# Altium PCB 105358-3LA002-01_EFM1-Hybrid.PcbDoc
Units mm, origin at the board's own origin, x right, y up, seen from the top; angles counter-clockwise.
Board outline 105.1 x 52.21 mm, 6 copper layers (Component Side, Inner Layer 1, Ground Plane (GND), Power Plane (VCC), Inner Layer 2, Solder Side), stack 0.975 mm thick; 1 components, 0 nets, 21 pads, 0 vias.
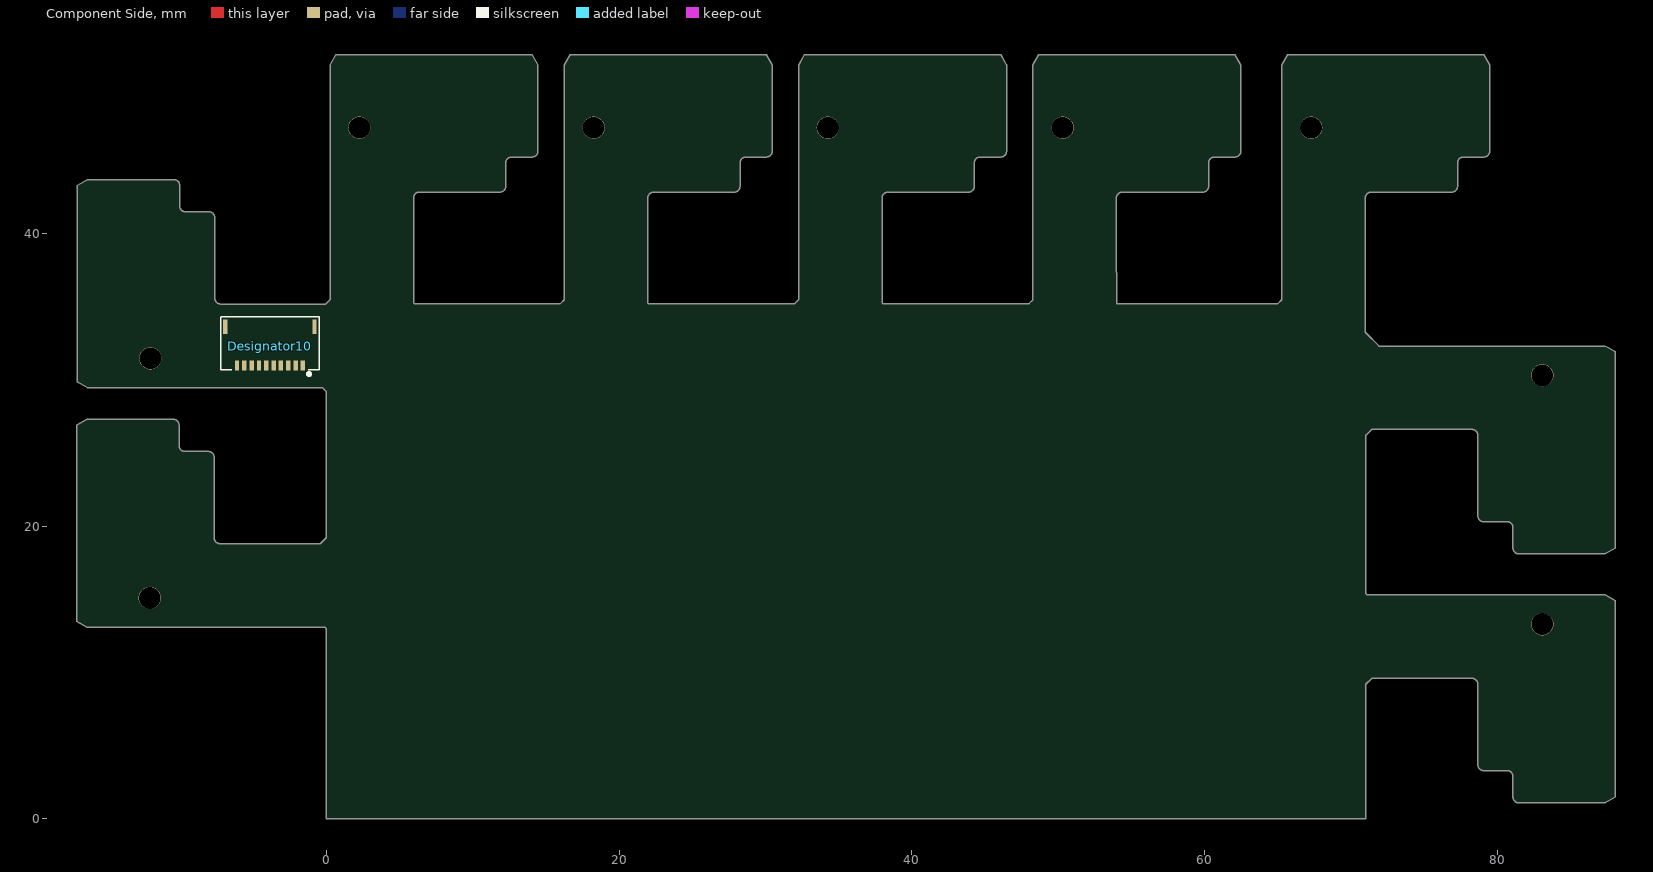
[diagram p0: Component Side view]
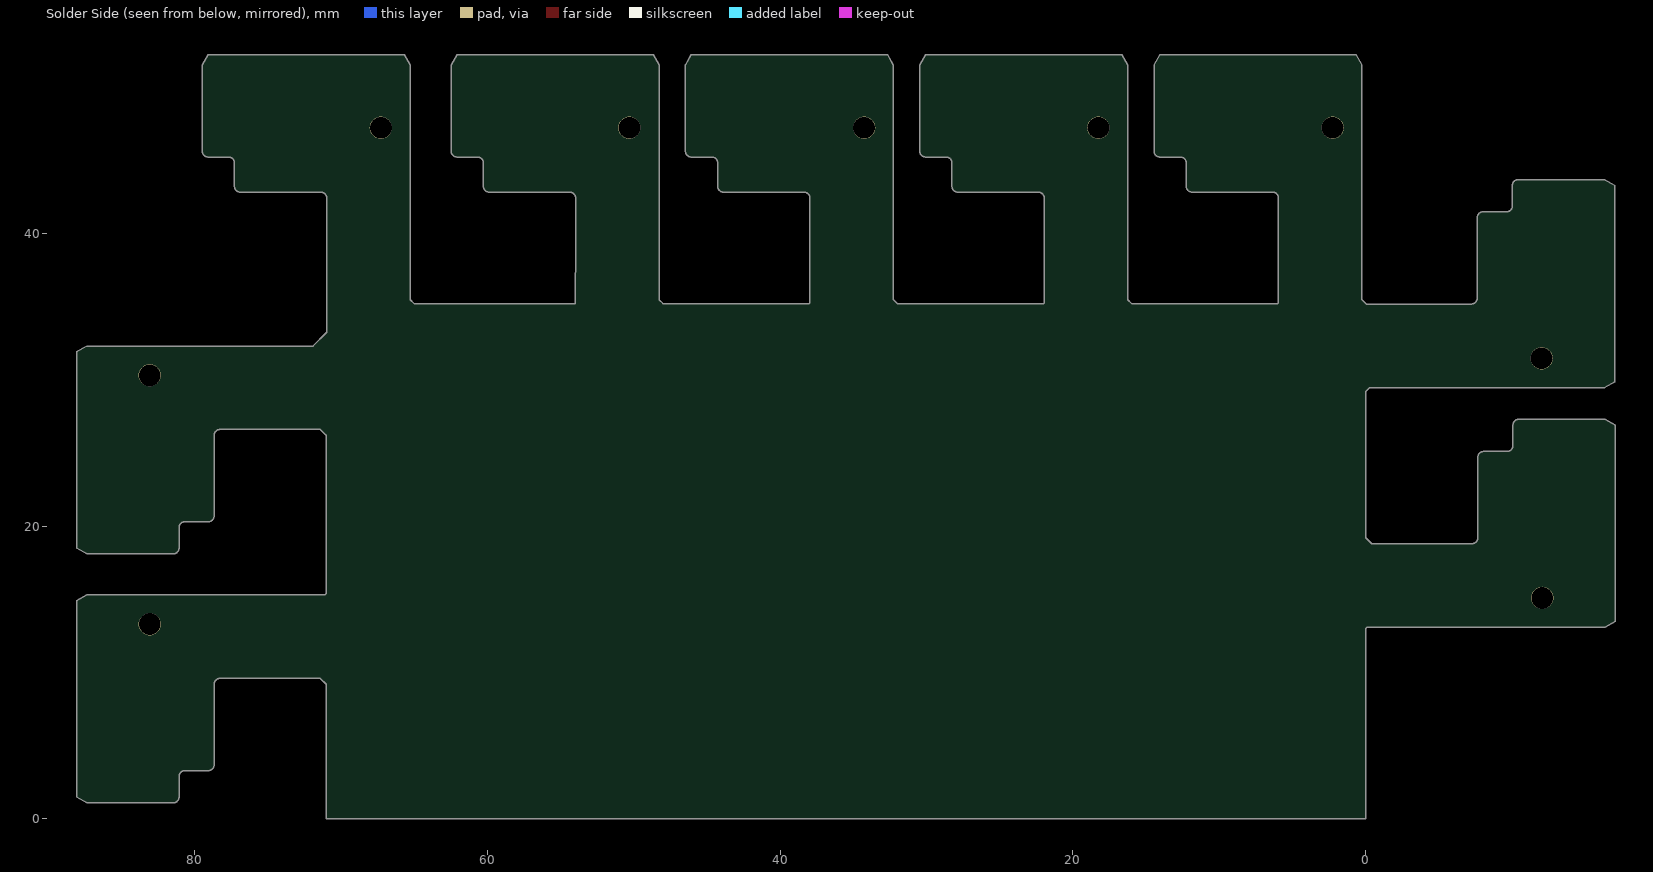
[diagram p1: Solder Side view, seen from below]
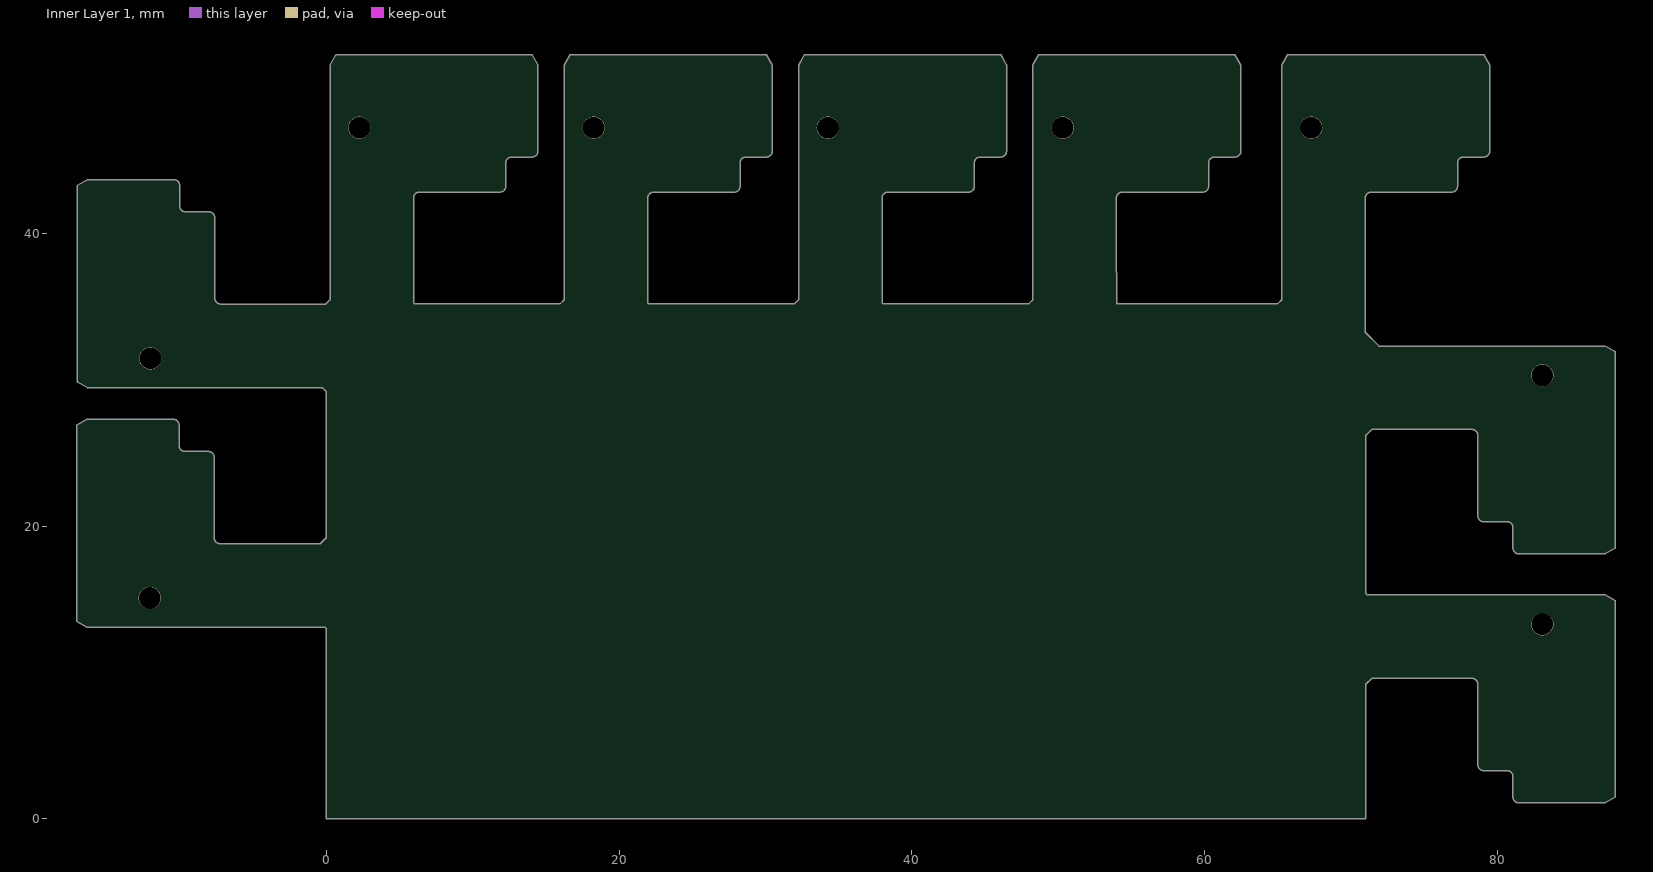
[diagram p2: Inner Layer 1]
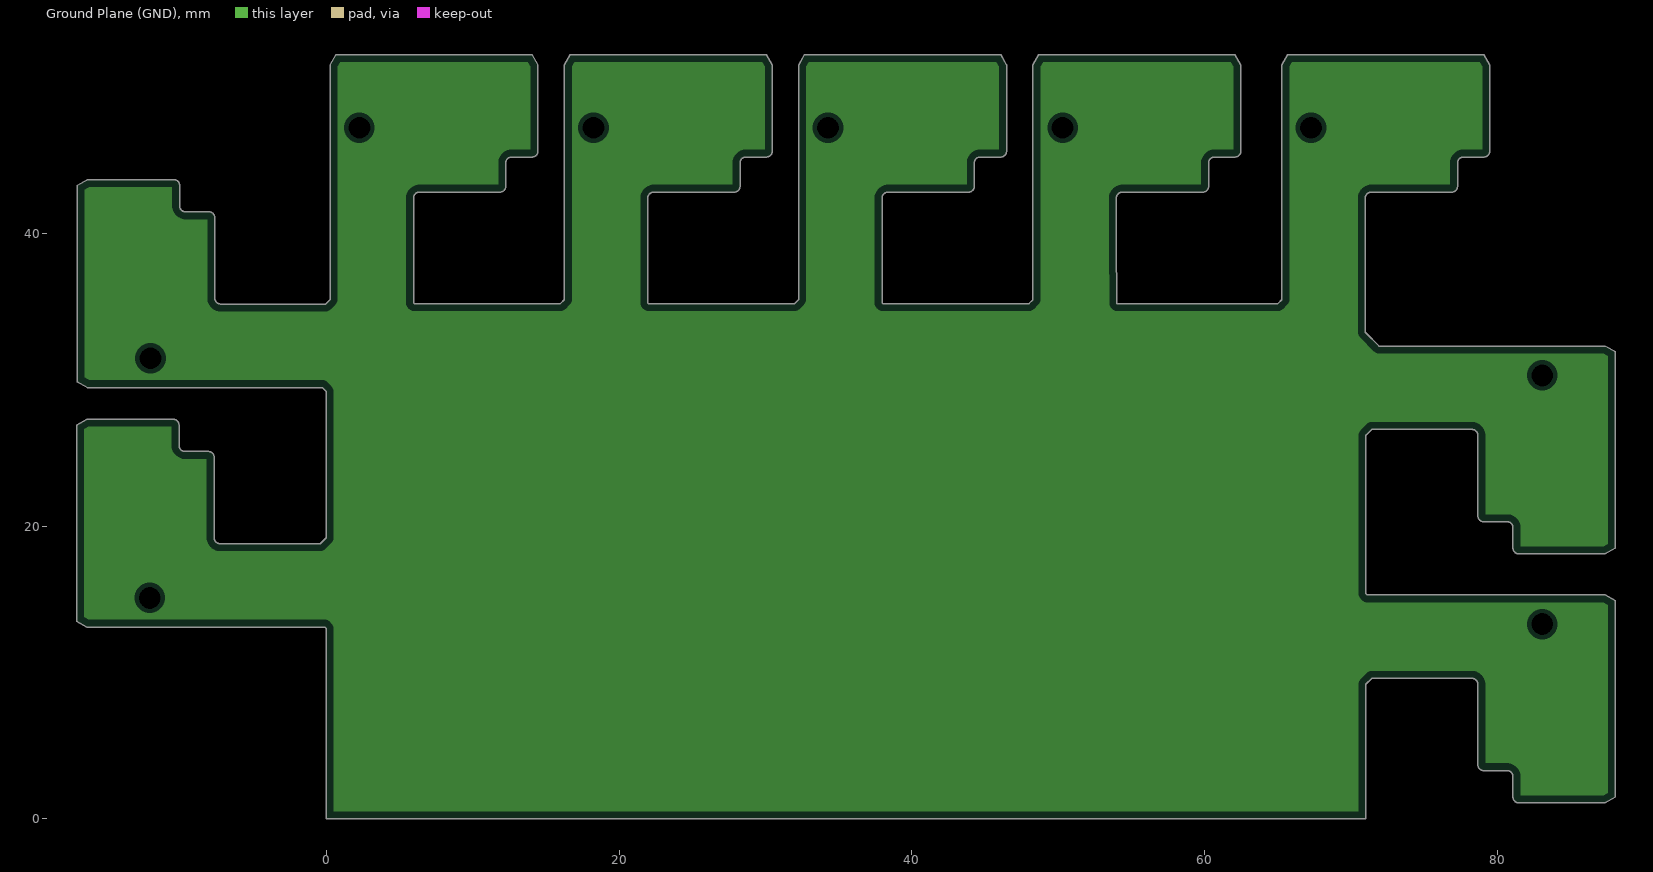
[diagram p3: Ground Plane (GND), clearances drawn from the general rule]
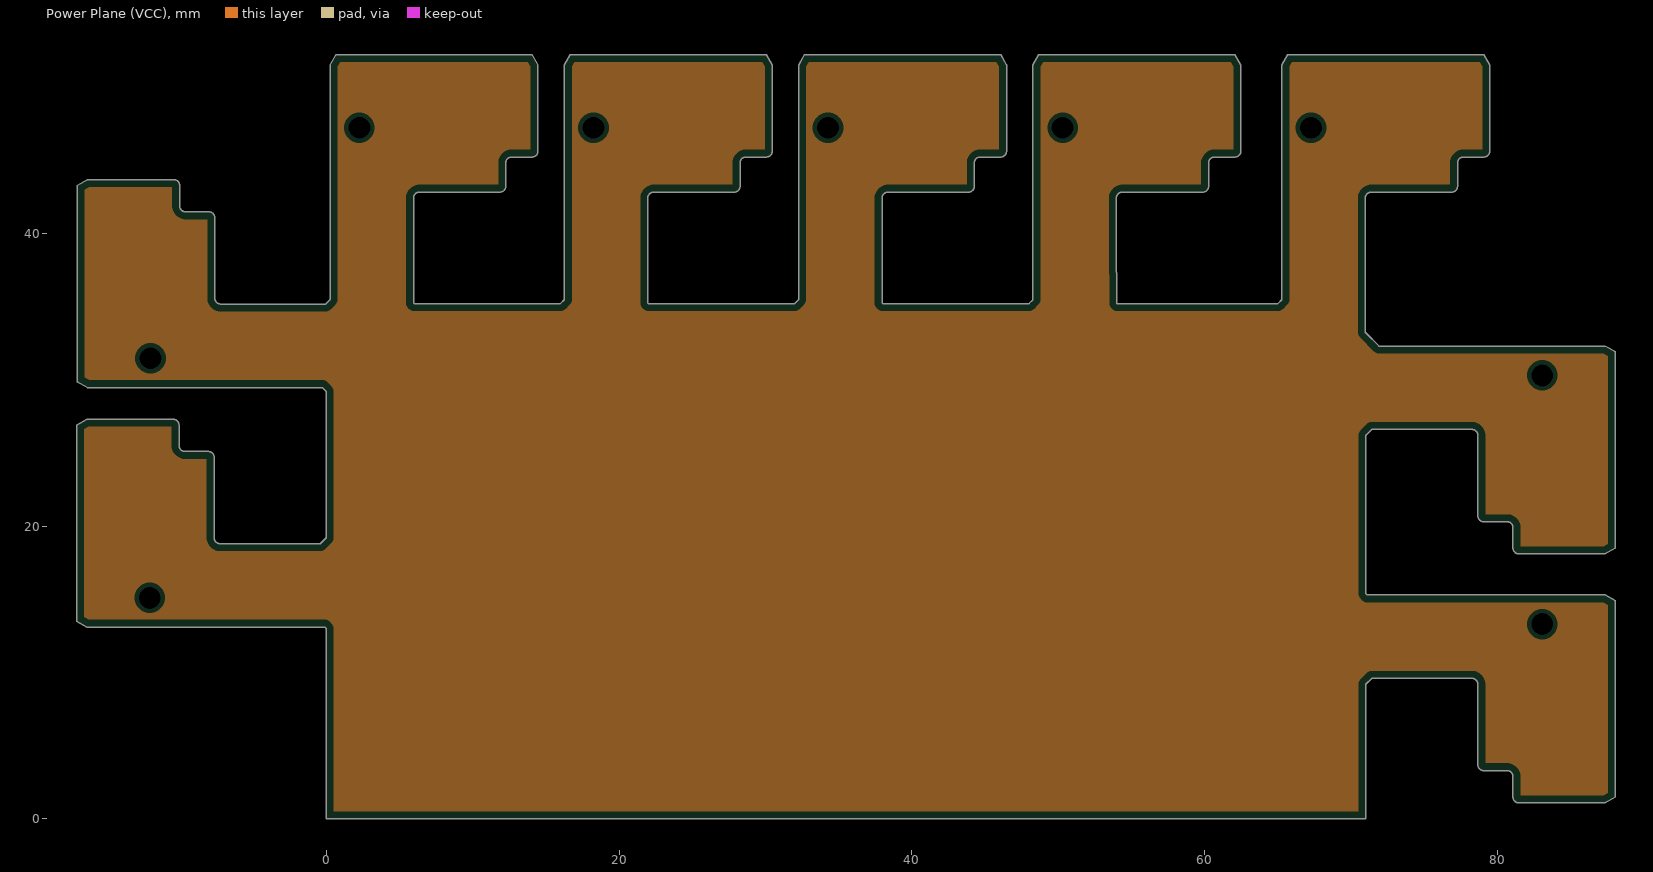
[diagram p4: Power Plane (VCC), clearances drawn from the general rule]
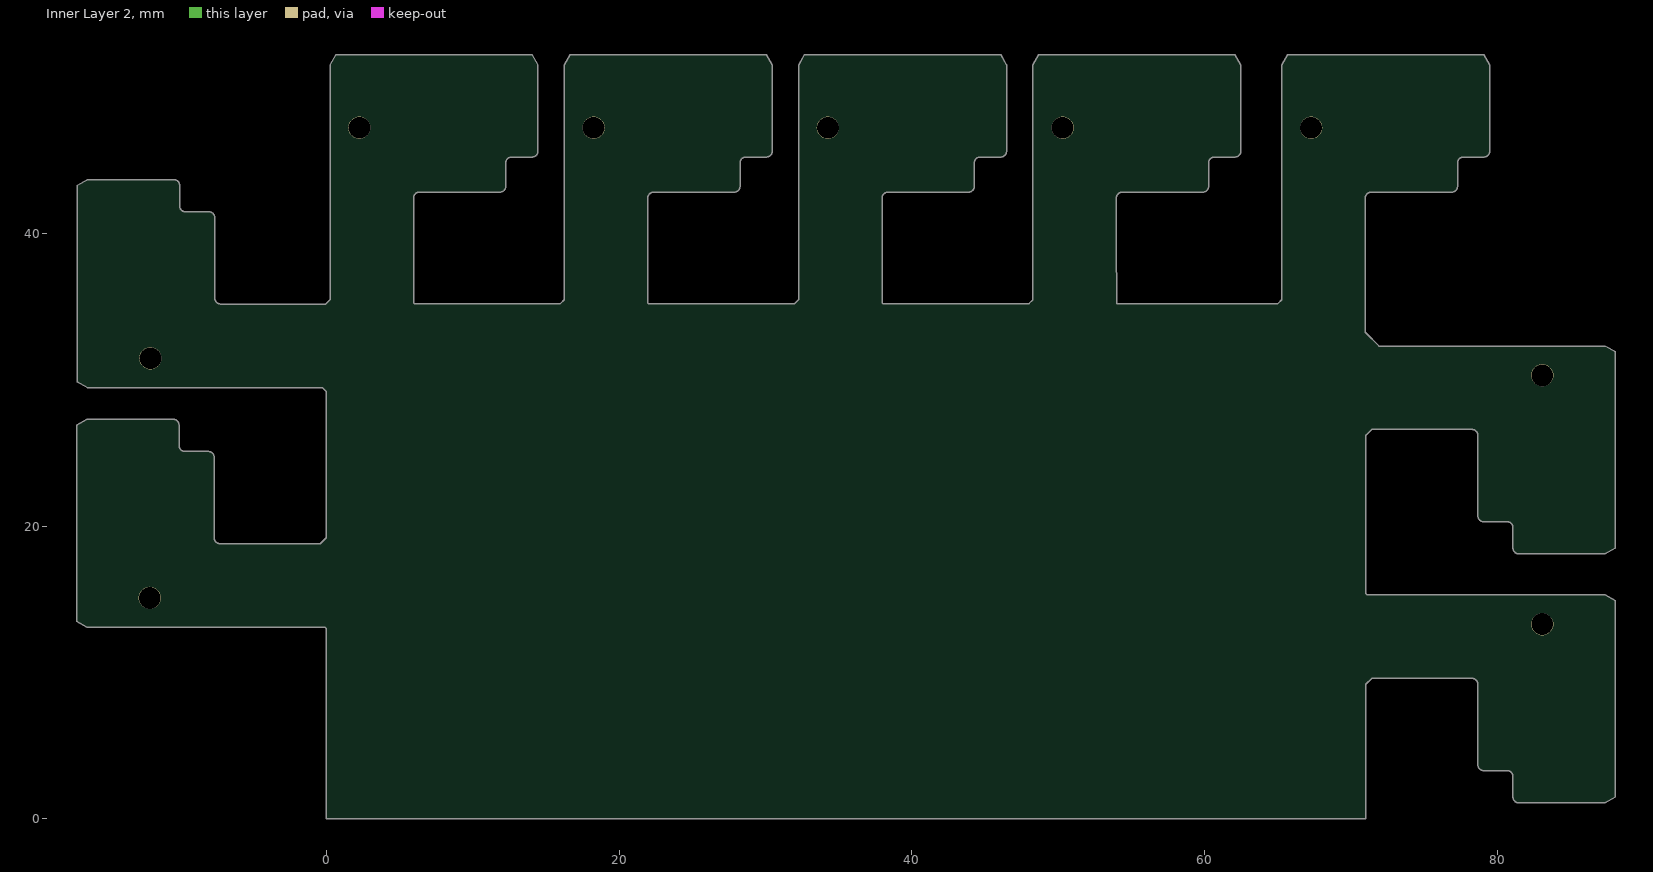
[diagram p5: Inner Layer 2]

## Layer stack, top to bottom
Top Solder: solder mask 0.0178, Solder Resist, Dk 4
Component Side: signal copper 0.0356
Dielectric 1: prepreg 0.0635, FR-4, Dk 4.2
Inner Layer 1: signal copper 0.0356
Dielectric 3: prepreg 0.0635, FR-4, Dk 4.2
Ground Plane (GND): plane copper 0.0356
Dielectric 6: core 0.508, FR-4, Dk 4.2
Power Plane (VCC): plane copper 0.0356
Dielectric 5: prepreg 0.0635, FR-4, Dk 4.2
Inner Layer 2: signal copper 0.0356
Dielectric 4: prepreg 0.0635, FR-4, Dk 4.2
Solder Side: signal copper 0.0356
Bottom Solder: solder mask 0.0178, Solder Resist, Dk 4

## Board outline
-16.35,13.1 -17.05,13.504 -17.05,26.896 -16.35,27.3 -10.45,27.3 cw(c-10.45,26.9) -10.05,26.9 -10.05,25.5 ccw(c-9.65,25.5) -9.65,25.1 -8.05,25.1 cw(c-8.05,24.7) -7.65,24.7 -7.65,19.2 ccw(c-7.25,19.2) -7.25,18.8 -0.4,18.8 0,19.2 0,29.2 -0.264,29.464 -16.306,29.464 -17.006,29.868 -17.006,43.26 -16.306,43.664 -10.406,43.664 cw(c-10.406,43.264) -10.006,43.264 -10.006,41.864 ccw(c-9.606,41.864) -9.606,41.464 -8.006,41.464 cw(c-8.006,41.064) -7.606,41.064 -7.606,35.564 ccw(c-7.206,35.564) -7.206,35.164 -0.036,35.164 0.264,35.464 0.264,51.506 0.668,52.206 14.06,52.206 14.464,51.506 14.464,45.606 cw(c14.064,45.606) 14.064,45.206 12.664,45.206 ccw(c12.664,44.806) 12.264,44.806 12.264,43.206 cw(c11.864,43.206) 11.864,42.806 6.364,42.806 ccw(c6.364,42.406) 5.964,42.406 5.964,35.236 6,35.2 16,35.2 16.264,35.464 16.264,51.506 16.668,52.206 30.06,52.206 30.464,51.506 30.464,45.606 cw(c30.064,45.606) 30.064,45.206 28.664,45.206 ccw(c28.664,44.806) 28.264,44.806 28.264,43.206 cw(c27.864,43.206) 27.864,42.806 22.364,42.806 ccw(c22.364,42.406) 21.964,42.406 21.964,35.236 22,35.2 32,35.2 32.264,35.464 32.264,51.506 32.668,52.206 46.06,52.206 46.464,51.506 46.464,45.606 cw(c46.064,45.606) 46.064,45.206 44.664,45.206 ccw(c44.664,44.806) 44.264,44.806 44.264,43.206 cw(c43.864,43.206) 43.864,42.806 38.364,42.806 ccw(c38.364,42.406) 37.964,42.406 37.964,35.236 38,35.2 48,35.2 48.264,35.464 48.264,51.506 48.668,52.206 62.06,52.206 62.464,51.506 62.464,45.606 cw(c62.064,45.606) 62.064,45.206 60.664,45.206 ccw(c60.664,44.806) 60.264,44.806 60.264,43.206 cw(c59.864,43.206) 59.864,42.806 54.364,42.806 ccw(c54.364,42.406) 53.964,42.406 53.964,37.326 54,37.29 54,35.2 65,35.2 65.264,35.464 65.264,51.506 65.668,52.206 79.06,52.206 79.464,51.506 79.464,45.606 cw(c79.064,45.606) 79.064,45.206 77.664,45.206 ccw(c77.664,44.806) 77.264,44.806 77.264,43.206 cw(c76.864,43.206) 76.864,42.806 71.364,42.806 ccw(c71.364,42.406) 70.964,42.406 70.964,33.236 71.02,33.18 71,33.2 71.9,32.3 87.35,32.3 88.05,31.896 88.05,18.504 87.35,18.1 81.45,18.1 cw(c81.45,18.5) 81.05,18.5 81.05,19.9 ccw(c80.65,19.9) 80.65,20.3 79.05,20.3 cw(c79.05,20.7) 78.65,20.7 78.65,26.2 ccw(c78.25,26.2) 78.25,26.6 71.4,26.6 71.3,26.5 71.1,26.3 71,26.2 71,15.4 71.1,15.3 87.35,15.3 88.05,14.896 88.05,1.504 87.35,1.1 81.45,1.1 cw(c81.45,1.5) 81.05,1.5 81.05,2.9 ccw(c80.65,2.9) 80.65,3.3 79.05,3.3 cw(c79.05,3.7) 78.65,3.7 78.65,9.2 ccw(c78.25,9.2) 78.25,9.6 71.4,9.6 71,9.2 71,0 0,0 0,13 -0.1,13.1

## Design rules (kind name [scope] priority, off if disabled: settings)
AcuteAngle [All] p1: minimum=6.00000000000000E+0001 checktracksonly=FALSE
AssemblyTestpoint [(IsPad And (OnTopLayer Or OnBottomLayer)) Or (IsVia) Or (IsPad And OnMultiLayer)] p1: testpointundercomponent=TRUE minsize=0.8 maxsize=2.5 preferedsize=1 minholesize=0 maxholesize=2 preferedholesize=0.7 testpointgrid=0.025 usegrid=FALSE gridtolerance=0 allowsidebottom=TRUE minspacing=2.54
BoardOutlineClearance [All] p1: gap=0.15 ignorepadtopadclearanceinfootprint=FALSE
Clearance Clearance_FIDU [InComponentClass('FIDU')] p1: gap=0.2 ignorepadtopadclearanceinfootprint=FALSE except(0: Arc-Hole Track-Hole SMDPad-Hole THPad-Hole Via-Hole Fill-Hole Poly-Hole Region-Hole Text-Hole)
Clearance TRX_LINE_CLEARENCE [InNetClass('RF_50_Ohm')] p2: gap=0.4 ignorepadtopadclearanceinfootprint=FALSE except(0: Arc-Hole Track-Hole SMDPad-Hole THPad-Hole Via-Hole Fill-Hole Poly-Hole Region-Hole Text-Hole)
Clearance Clearance_4 [All] p3: gap=0.127 ignorepadtopadclearanceinfootprint=FALSE // All - All
Clearance Clearance_2 [InNetClass('Primary') vs InNetClass('Primary') or InNet('GND')] p4: gap=2.5 ignorepadtopadclearanceinfootprint=FALSE except(0: Arc-Hole Track-Hole SMDPad-Hole THPad-Hole Via-Hole Fill-Hole Poly-Hole Region-Hole Text-Hole) // Primary - Primary
Clearance Clearance_1 [OnLayer('Mid-Layer 1') or OnLayer('Multi-Layer') vs OnLayer('Mid-Layer 1')] p5: gap=0.4 ignorepadtopadclearanceinfootprint=FALSE except(0: Arc-Hole Track-Hole SMDPad-Hole THPad-Hole Via-Hole Fill-Hole Poly-Hole Region-Hole Text-Hole) // Inner Layers
Clearance Clearance_TP [InComponentClass('TP')] p6: gap=0.127 ignorepadtopadclearanceinfootprint=FALSE except(0: Arc-Hole Track-Hole SMDPad-Hole THPad-Hole Via-Hole Fill-Hole Poly-Hole Region-Hole Text-Hole; 0.2: Arc-Arc Arc-Track Arc-SMDPad Arc-THPad Arc-Via Arc-Fill Arc-Poly Arc-Region Track-Track Track-SMDPad Track-THPad Track-Via Track-Fill Track-Poly Track-Region THPad-THPad THPad-Via THPad-Fill THPad-Poly THPad-Region)
ComponentClearance [ALL and not( ( InComponentClass('NET_TIE') or InComponentClass('TP'))OR InComponentClass('FIDU')or InComponentClass('3D_IGNORE')or InComponent('D401'))] p1: gap=0.15 collisioncheckmode=3 verticalgap=0.1 showdistances=TRUE
DiffPairsRouting [All] p1: maxlimit=0.254 minlimit=0.2 mostfreqgap=0.2 toplayer_minwidth=0.127 toplayer_maxwidth=0.381 toplayer_prefwidth=0.2 midlayer1_minwidth=0.127 midlayer1_maxwidth=0.381 midlayer1_prefwidth=0.2 midlayer2_minwidth=0.127 midlayer2_maxwidth=0.381 midlayer2_prefwidth=0.2 bottomlayer_minwidth=0.127 bottomlayer_maxwidth=0.381 bottomlayer_prefwidth=0.2 maxuncoupledlength=12.7
FabricationTestPointUsage TestPointUsage [All] p1: valid=0 allowmultiple=FALSE
FabricationTestpoint Testpoint [(IsPad And (OnTopLayer Or OnBottomLayer)) Or (IsVia) Or (IsPad And OnMultiLayer)] p1: side=2 testpointundercomponent=TRUE minsize=0.8 maxsize=2.5 preferedsize=1 minholesize=0 maxholesize=2 preferedholesize=0.7 testpointgrid=2.54 allowsidebottom=TRUE usegrid=TRUE gridoriginx=109.725 gridoriginy=79.23 gridtolerance=0 minspacing=2.54
FanoutControl Fanout_Default [All] p1: bgadir=Out bgaviamode=Centered fanoutstyle=Auto fanoutdirection=Alternating viagrid=0.025 // Fanout_Default (Default Rule)
FanoutControl Fanout_Small [(CompPinCount < 5)] p2: bgadir=Out bgaviamode=Centered fanoutstyle=Auto fanoutdirection=OutThenIn viagrid=0.025 // Fanout_Small (Default Rule)
FanoutControl Fanout_LCC [IsLCC] p4: bgadir=Out bgaviamode=Centered fanoutstyle=Auto fanoutdirection=Alternating viagrid=0.025 // Fanout_LCC (Default Rule)
FanoutControl Fanout_BGA [IsBGA] p5: bgadir=Out bgaviamode=Centered fanoutstyle=Auto fanoutdirection=Alternating viagrid=0.025 // Fanout_BGA (Default Rule)
HoleSize [All] p1: absolutevalues=TRUE maxlimit=3.5 minlimit=0.1 maxpercent=80.000 minpercent=20.000
HoleToHoleClearance [All] p1: gap=0.127 allowstackedmicrovias=TRUE
MinimumAnnularRing MinimumAnnularRing_Uvia1 [InDrillLayerPair('Component Side - Inner Layer 1')] p1: minimumring=0.074
MinimumAnnularRing MinimumAnnularRing_Uvia2 [InDrillLayerPair('Inner Layer 2 - Solder Side')] p2: minimumring=0.074
MinimumAnnularRing MinimumAnnularRing_2 [isPad] p3: minimumring=0.2
MinimumAnnularRing MinimumAnnularRing_1 [isVia] p4: minimumring=0.125
MinimumSolderMaskSliver [All] p1: minsoldermaskwidth=0.06
MinimumSolderMaskSliver SilkscreenOverComponentPads [IsPad] p2: minsoldermaskwidth=0.075
PlaneClearance [All] p1: clearance=0.3
PlaneConnect PlaneConnect_VIA [isVia or HasFootprint('PAD PROGRAMMING')] p1: planeconnectstyle=Direct reliefexpansion=0.508 reliefentries=4 reliefconductorwidth=0.254 reliefairgap=0.254
PlaneConnect [All] p2: planeconnectstyle=Relief reliefexpansion=0.508 reliefentries=4 reliefconductorwidth=0.254 reliefairgap=0.254
PolygonConnect PolygonConnect_NO-Thermal [All vs IsNamedPolygon('NETC303_1_5VIN') or  IsNamedPolygon('Solder Side-VCC_SYS') or IsNamedPolygon('CC-3V_CAPS') or  IsNamedPolygon('Ss-5V_USB_IN_2') or IsNamedPolygon('SS-NetC307_2') or IsNamedPolygon('SS-GND_SB03') or IsNamedPolygon('Component Side-NetC307_2') or IsNamedPolygon('Solder Side-NetJ201_5') or  IsNamedPolygon('Component Side-NetJ201_5')or  IsNamedPolygon('Component Side-BLE_VDD_4')or IsNamedPolygon('SS-BLE_VDD_4')or IsNamedPolygon('SS-GND_9VRED')] p1: connectstyle=Direct reliefconductorwidth=0.254 reliefentries=4 polygonreliefangle="90 Angle" airgapwidth=0.254
PolygonConnect PolygonConnect_VIA [IsVia] p2: connectstyle=Direct reliefconductorwidth=0.254 reliefentries=4 polygonreliefangle="90 Angle" airgapwidth=0.254
PolygonConnect NET_TIE [InComponentClass('NET_TIE')] p3: connectstyle=Direct reliefconductorwidth=0.254 reliefentries=4 polygonreliefangle="90 Angle" airgapwidth=0.254
PolygonConnect PolygonConnect_TP_I [HasFootprint('TESTPOINT_C_R0608')or HasFootprint('TESTPOINT_C_R0402')OR HasFootprint('PAD PROGRAMMING')] p4: connectstyle=Direct reliefconductorwidth=0.254 reliefentries=4 polygonreliefangle="90 Angle" airgapwidth=0.254
PolygonConnect [All] p5: connectstyle=Relief reliefconductorwidth=0.254 reliefentries=4 polygonreliefangle="90 Angle" airgapwidth=0.254
RoutingVias [((StartLayer = 'Component Side') and (StopLayer = 'Solder Side' )) or ((StartLayer = 'Solder Side') and (StopLayer = 'Component Side' ))] p1: holewidth=0.15 width=0.401 viastyle="Through Hole" minholewidth=0.15 minwidth=0.4 maxholewidth=0.2 maxwidth=0.61
RoutingVias Microvia [((StartLayer = 'Component Side') and (StopLayer = 'Inner Layer 1' )) or  ((StartLayer = 'Inner Layer 2'  ) and (StopLayer = 'Solder Side')) or ((StartLayer = 'Inner Layer 1') and (StopLayer = 'Component Side'  )) or ((StartLayer = 'Solder Side' ) and (StopLayer = 'Inner Layer 2'))] p2: holewidth=0.1 width=0.31 viastyle="Through Hole" minholewidth=0.1 minwidth=0.25 maxholewidth=0.15 maxwidth=0.45
RoutingVias BuriedVia [((StartLayer = 'Inner Layer 1') and (StopLayer = 'Inner Layer 2' )) or  ((StartLayer = 'Inner Layer 2') and (StopLayer = 'Inner Layer 1' ))] p3: holewidth=0.15 width=0.401 viastyle="Through Hole" minholewidth=0.15 minwidth=0.401 maxholewidth=0.2 maxwidth=0.61
SilkToSilkClearance [All] p1: silktosilkclearance=0
SilkToSolderMaskClearance SilkscreenOverComponentPads_1 [IsPad] p1: minsilkscreentomaskgap=0 clearancetoexposedcopper=TRUE
SolderMaskExpansion SolderMaskExpansion_2 [All] p1: expansion=0.1
SolderMaskExpansion SolderMaskExpansion_1 [isVia And Not TestpointBottom] p2: expansion=-0.508
Width [All] p1: maxlimit=5 minlimit=0.127 preferedwidth=0.2
14 further rules are at their usual default settings.

## Components (designator, comment, footprint, x,y, rotation, side; value= is the part's Value field where it differs from the comment)
Designator10 "Comment" FPCx10-5034801000 -3.84,30.96 r270 top

## Footprints (in the part's own frame and the unit in brackets; to place one, negate y for a bottom-side part, rotate by r counter-clockwise, add the part's x,y. Pads: shape width x height; smd on the part's side, far side on the other; paste and mask are expansions set on the pad)
FPCx10-5034801000 [mm] "CONN FFC FPC 10POS 0.50MM R/A"
  rect 0.7x0.3 smd mask+0.07: 1(0,2.25) 2(0,1.75) 3(0,1.25) 4(0,0.75) 5(0,0.25) 6(0,-0.25) 7(0,-0.75) 8(0,-1.25) 9(0,-1.75) 10(0,-2.25)
  rect 1x0.3 smd mask+0.07: SH(-2.65,3.04) SH(-2.65,-3.04)
  silkscreen extent -3.32,-3.37 0.65,3.35, body extent -3.32,-3.35 0.27,3.35, height 1.88

## Free pads (board coordinates)
  round 1.524 hole 1.5: ""(-12.05,15.1) ""(-12.006,31.464) ""(2.264,47.206) ""(18.264,47.206) ""(34.264,47.206) ""(50.3,47.206) ""(67.264,47.206) ""(83.05,13.3) ""(83.05,30.3)

## Nets (pads, with @x,y where several pads share a name; then routed paths per layer and width w, separated by ;. In a path a pad name is that pad's centre, name@x,y a point inside that pad or via, vN(x,y) a via of type N, cw(c..) or ccw(c..) an arc to the next point about the centre after c; other vN are vias at no path point)
pads on no net: Designator10.1 Designator10.2 Designator10.3 Designator10.4 Designator10.5 Designator10.6 Designator10.7 Designator10.8 Designator10.9 Designator10.10 Designator10.SH

## Polygon pours and split planes (outlines as drawn)
no net on Ground Plane (GND) (split plane): 495 vertices, not listed, extent -16.54,0.51 87.54,51.696
no net on Power Plane (VCC) (split plane): 495 vertices, not listed, extent -16.54,0.51 87.54,51.696

## Other copper
Component Side:
  text ".Layer_Name" at 1.994,-5.02 h1
Inner Layer 1:
  text ".Layer_Name" at 1.994,-9.02 h1
Inner Layer 2:
  text ".Layer_Name" at 19.994,-5.02 h1
Solder Side:
  text ".Layer_Name" at 30.491,-9.02 h1
Ground Plane (GND) (plane layer: these items are gaps in the copper):
  text ".Layer_Name" at 1.994,-13.02 h1
Power Plane (VCC) (plane layer: these items are gaps in the copper):
  text ".Layer_Name" at 1.994,-17.02 h1

## Silkscreen, mask and mechanical layers (free items; w line width, h text height)
Top Overlay:
  text ".Layer_Name" at 20.044,-12.887 h1
Bottom Overlay:
  text ".Layer_Name" at 30.491,-16.887 h1
Top Paste:
  text ".Layer_Name" at 37.994,-5.02 h1
Bottom Paste:
  text ".Layer_Name" at 37.994,-9.02 h1
Top Solder:
  text ".Layer_Name" at 37.994,-13.02 h1
Bottom Solder:
  text ".Layer_Name" at 37.994,-17.02 h1
Drill Guide:
  text ".Layer_Name" at 55.994,-17.02 h1
Mechanical 1:
  text ".Layer_Name" at 55.994,-5.02 h1
Mechanical 2:
  drawing of 194 lines, arcs and shapes, not listed
Mechanical 9:
  lines w0.013: -18.36,25.95 -12.74,25.95 ; -18.316,42.314 -12.696,42.314 ; -18.17,14.596 -12.17,14.596 ; -18.126,30.96 -12.126,30.96 ; -15.55,23.55 -15.55,28.35 ; -15.506,39.914 -15.506,44.714 ; -15.3,15.1 -14.55,15.1 -12.05,15.1 ; -15.256,31.464 -14.506,31.464 -12.006,31.464 ; -15.17,11.971 -15.17,17.221 ; -15.126,28.335 -15.126,33.585 ; -12.05,11.85 -12.05,12.6 -12.05,15.1 ; -12.05,18.35 -12.05,17.6 -12.05,15.1 ; -12.006,28.214 -12.006,28.964 -12.006,31.464 ; -12.006,34.714 -12.006,33.964 -12.006,31.464 ; -8.8,15.1 -9.55,15.1 -12.05,15.1 ; -8.756,31.464 -9.506,31.464 -12.006,31.464 ; -0.986,47.206 -0.236,47.206 2.264,47.206 ; -0.865,50.326 4.385,50.326 ; 1.76,47.326 1.76,53.326 ; 2.264,43.956 2.264,44.706 2.264,47.206 ; 2.264,50.456 2.264,49.706 2.264,47.206 ; 5.514,47.206 4.764,47.206 2.264,47.206 ; 10.714,50.706 15.514,50.706 ; 13.114,47.896 13.114,53.516 ; 15.014,47.206 15.764,47.206 18.264,47.206 ; 15.135,50.326 20.385,50.326 ; 17.76,47.326 17.76,53.326 ; 18.264,43.956 18.264,44.706 18.264,47.206 ; 18.264,50.456 18.264,49.706 18.264,47.206 ; 21.514,47.206 20.764,47.206 18.264,47.206 ; 26.714,50.706 31.514,50.706 ; 29.114,47.896 29.114,53.516 ; 31.014,47.206 31.764,47.206 34.264,47.206 ; 31.135,50.326 36.385,50.326 ; 33.76,47.326 33.76,53.326 ; 34.264,43.956 34.264,44.706 34.264,47.206 ; 34.264,50.456 34.264,49.706 34.264,47.206 ; 37.514,47.206 36.764,47.206 34.264,47.206 ; 42.714,50.706 47.514,50.706 ; 45.114,47.896 45.114,53.516 ; 47.014,47.206 47.764,47.206 50.264,47.206 ; 47.135,50.326 52.385,50.326 ; 49.76,47.326 49.76,53.326 ; 50.264,43.956 50.264,44.706 50.264,47.206 ; 50.264,50.456 50.264,49.706 50.264,47.206 ; 53.514,47.206 52.764,47.206 50.264,47.206 ; 58.714,50.706 63.514,50.706 ; 61.114,47.896 61.114,53.516 ; 64.014,47.206 64.764,47.206 67.264,47.206 ; 64.135,50.326 69.385,50.326 ; 66.76,47.326 66.76,53.326 ; 67.264,43.956 67.264,44.706 67.264,47.206 ; 67.264,50.456 67.264,49.706 67.264,47.206 ; 70.514,47.206 69.764,47.206 67.264,47.206 ; 75.714,50.706 80.514,50.706 ; 78.114,47.896 78.114,53.516 ; 79.8,13.3 80.55,13.3 83.05,13.3 ; 79.8,30.3 80.55,30.3 83.05,30.3 ; 83.05,10.05 83.05,10.8 83.05,13.3 ; 83.05,16.55 83.05,15.8 83.05,13.3 ; 83.05,27.05 83.05,27.8 83.05,30.3 ; 83.05,33.55 83.05,32.8 83.05,30.3 ; 83.17,13.804 89.17,13.804 ; 83.17,30.804 89.17,30.804 ; 83.74,2.45 89.36,2.45 ; 83.74,19.45 89.36,19.45 ; 86.17,11.179 86.17,16.429 ; 86.17,28.179 86.17,33.429 ; 86.3,13.3 85.55,13.3 83.05,13.3 ; 86.3,30.3 85.55,30.3 83.05,30.3 ; 86.55,0.05 86.55,4.85 ; 86.55,17.05 86.55,21.85
  lines w0.1: -2.17,13.1 -2.17,18.8 ; -2.126,29.464 -2.126,35.164 ; 0.264,37.326 5.964,37.326 ; 16.264,37.326 21.964,37.326 ; 32.264,37.326 37.964,37.326 ; 48.264,37.326 53.964,37.326 ; 65.264,37.326 70.964,37.326 ; 73.17,9.6 73.17,15.3 ; 73.17,26.6 73.17,32.3
BRD_Outline:
  text ".Layer_Name" at 55.994,-9.02 h1
Drill Drawing:
  text ".Layer_Name" at 55.994,-13.02 h1